# Altium PCB Module Board.PcbDoc (part 5 of 6)
Units mm, origin at the board's own origin, x right, y up, seen from the top; angles counter-clockwise.
Board outline 300 x 80 mm, 4 copper layers (Top Layer, GND1-Layer, GND2-Layer, Bottom Layer), stack 1.586 mm thick; 425 components, 248 nets, 1063 pads, 936 vias.
Unrouted connection lines stored in the file: 3.
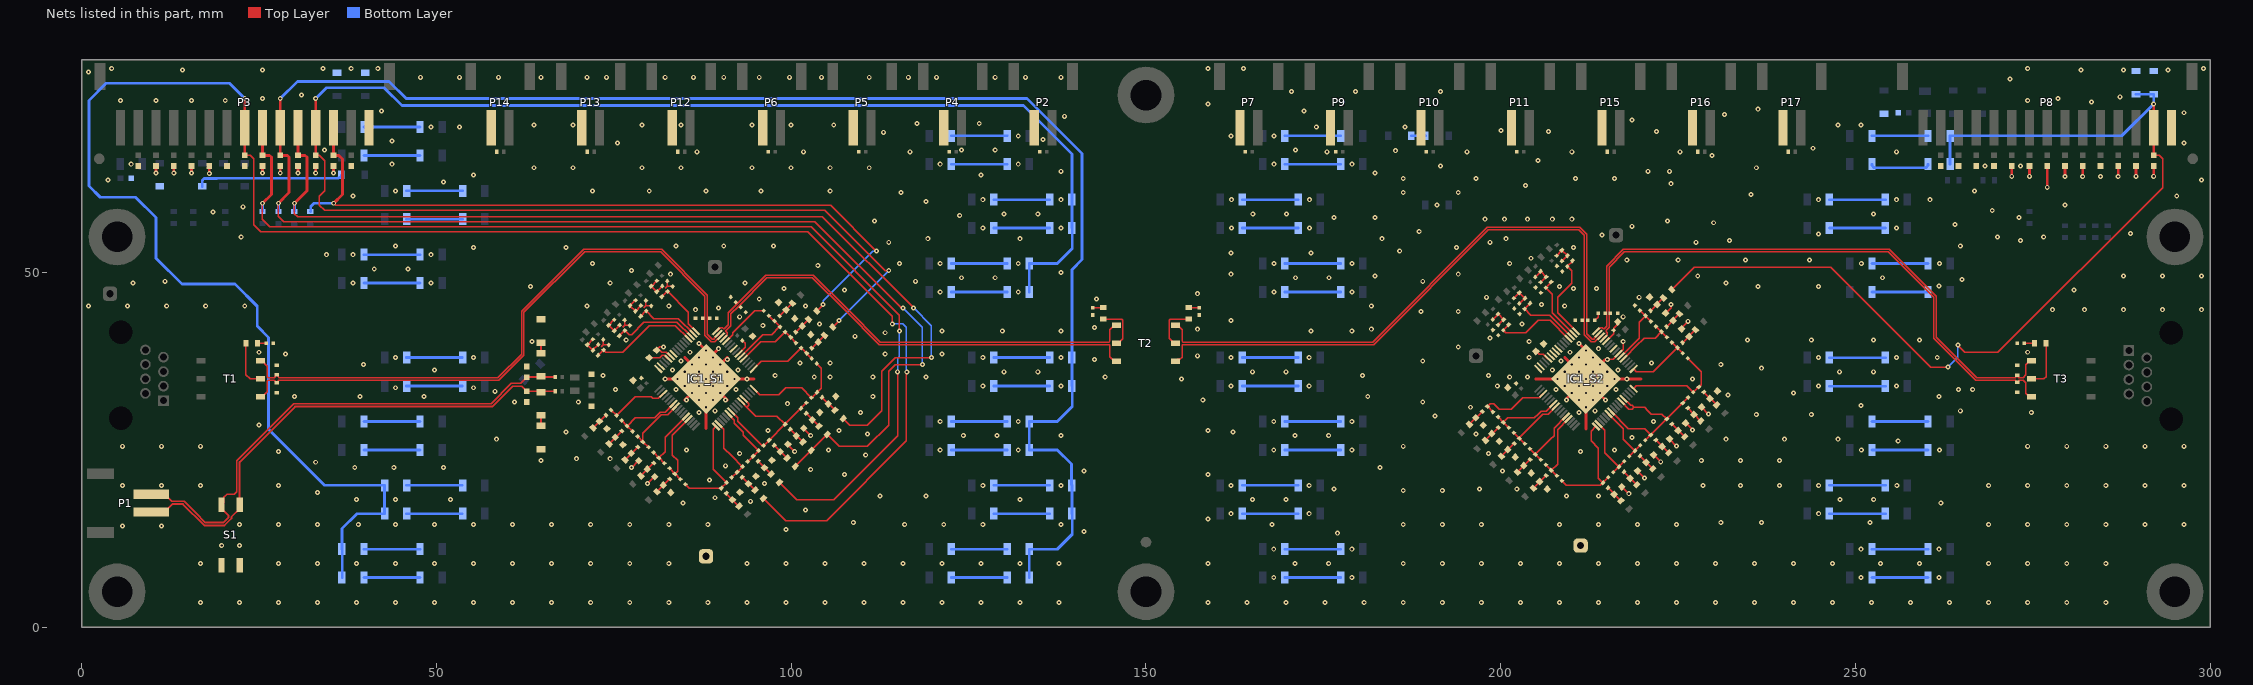
[diagram p6: the nets of this part, all layers, seen from the top]

## Via types
v1: diameter 0.7, hole 0.3, Top Layer to Bottom Layer, 936 vias

## Nets (pads, with @x,y where several pads share a name; then routed paths per layer and width w, separated by ;. In a path a pad name is that pad's centre, name@x,y a point inside that pad or via, vN(x,y) a via of type N, cw(c..) or ccw(c..) an arc to the next point about the centre after c; other vN are vias at no path point) (continued)
CELL_REF_S2: C62_S2.2 D6_S2.2 D7_S2.1 P8.2 R48_S2.2 R57_RB_C12.1 R59_RB_C12.1 | length 139.8
  Top Layer w0.2: R48_S2.2@224.085,47.585 227.25,50.75 246.5,50.75 260.6,36.65 v1(263,36.65) ; v1(264.4,39.75) 265.4,38.75 270.053,38.75 293.25,61.947 293.25,66 292.75,66.5 C62_S2.2@292,66.5
  Top Layer w0.4: C62_S2.2@292,66.5 P8.2@292,70.4 v1(292,73.75)
  Bottom Layer w0.2: v1(263,36.65) 264.4,38.05 v1(264.4,39.75)
  Bottom Layer w0.4: R59_RB_C12.1@263.302,65.25 R57_RB_C12.1@263.302,69.25 287.5,69.25 v1(292,73.75) D6_S2.2@292,75.115 D7_S2.1@289.5,75.115
CT_1_S1: C56_S1.1 C59_S1.2 IC1_S1.37 R47_S1.1 | length 9.6
  Top Layer w0.2: IC1_S1.37@93.295,37.82 95.725,40.25 96.325,40.25 97.768,40.25 C59_S1.2@99.134,41.616 99.905,40.845 C56_S1.1@100.677,40.073
CT_1_S2: C56_S2.1 C59_S2.2 IC1_S2.37 R47_S2.1 | length 9.1
  Top Layer w0.2: IC1_S2.37@217.295,37.82 219.4,39.925 219.825,40.35 220.137,40.663 220.225,40.75 221.75,40.75 R47_S2.1@222.625,41.625 ; C59_S2.2@221.854,42.396 R47_S2.1@222.625,41.625 ; R47_S2.1@222.646,41.646 R47_S2.1@222.625,41.625 ; C56_S2.1@223.397,40.854 R47_S2.1@222.625,41.625
CT_2_S1: C53_S1.1 C56_S1.2 IC1_S1.33 R44_S1.1 | length 10
  Top Layer w0.2: IC1_S1.33@94.709,36.406 95.803,37.5 99.518,37.5 C56_S1.2@101.384,39.366 C53_S1.1@102.897,37.854
CT_2_S2: C53_S2.1 C56_S2.2 IC1_S2.33 R44_S2.1 | length 9.9
  Top Layer w0.2: IC1_S2.33@218.709,36.406 219.115,36 221.5,36 224.854,39.354 224.854,39.396 C56_S2.2@224.104,40.146 ; R44_S2.1@224.896,39.396 224.896,39.354 C53_S2.1@225.647,38.604
CT_3_S1: C50_S1.1 C53_S1.2 IC1_S1.32 R42_S1.1 | length 15.2
  Top Layer w0.2: IC1_S1.32@94.709,33.594 95.553,32.75 98.25,32.75 99.25,33.75 99.475,33.75 101.457,33.75 C50_S1.1@102.854,32.353 102.896,32.353 R42_S1.1@103.646,33.104 104.25,33.707 104.25,36.5 C53_S1.2@103.604,37.146
CT_3_S2: C50_S2.1 C53_S2.2 IC1_S2.32 R42_S2.1 | length 15
  Top Layer w0.2: IC1_S2.32@218.709,33.594 219.115,34 224.225,34 226.207,34 C50_S2.1@227.104,33.103 227.854,33.854 R42_S2.1@227.896,33.854 228.25,34.207 228.25,36 C53_S2.2@226.354,37.896
CT_4_S1: C42_S1.1 C50_S1.2 IC1_S1.23 IC1_S1.27 IC1_S1.28 R34_S1.1 R37_S1.1 R39_S1.1 | length 24.5
  Top Layer w0.2: IC1_S1.23@91.527,30.412 92.439,29.5 92.439,29.056 94.485,27.01 95.891,25.603 C42_S1.1@96.104,25.603 96.875,26.375 99.125,28.625 101.375,30.875 C50_S1.2@102.146,31.646 ; IC1_S1.27@92.941,31.827 93.736,31.032 ; IC1_S1.28@93.295,32.18 94,31.475 94,31.297 93.736,31.032 ; R37_S1.1@99.146,28.604 98,29.75 97.225,29.75 95.018,29.75 93.736,31.032
CT_4_S2: C42_S2.1 C50_S2.2 IC1_S2.23 IC1_S2.27 IC1_S2.28 R34_S2.1 R37_S2.1 R39_S2.1 | length 25.1
  Top Layer w0.2: IC1_S2.23@215.527,30.412 217.939,28 218.225,28 220.25,28 R34_S2.1@221.125,27.125 ; IC1_S2.27@216.941,31.827 218.018,30.75 218.5,30.75 218.75,31 ; IC1_S2.28@217.295,32.18 217.348,32.18 218.278,31.25 218.5,31.25 218.75,31 ; C42_S2.1@220.354,26.353 R34_S2.1@221.125,27.125 ; C50_S2.2@226.396,32.396 225.625,31.625 R37_S2.1@223.375,29.375 ; 218.75,31 220.25,31 220.737,30.512 221.2,30.05 222.7,30.05 R37_S2.1@223.375,29.375 ; R34_S2.1@221.125,27.125 221.896,27.896 R37_S2.1@223.375,29.375
CT_7_S1: C38_S1.1 C42_S1.2 IC1_S1.22 R29_S1.1 | length 9.1
  Top Layer w0.2: IC1_S1.22@91.173,30.059 91.173,29.991 92,29.164 92,28.75 93.25,27.5 93.25,27.043 93.884,26.409 C42_S1.2@95.396,24.896 94.625,24.125 C38_S1.1@93.854,23.353
CT_7_S2: C38_S2.1 C42_S2.2 IC1_S2.22 R29_S2.1 | length 8.9
  Top Layer w0.2: IC1_S2.22@215.173,30.059 217.25,27.982 217.25,27.025 217.25,26.5 R29_S2.1@218.875,24.875 ; C38_S2.1@218.104,24.103 R29_S2.1@218.875,24.875 ; C42_S2.2@219.646,25.646 R29_S2.1@218.875,24.875
CT_8_S1: C32_S1.1 C38_S1.2 IC1_S1.18 R26_S1.1 | length 9.6
  Top Layer w0.2: IC1_S1.18@89.759,28.645 90.5,27.904 90.5,25.25 91.612,24.138 93.104,22.646 C38_S1.2@93.146,22.646 92.375,21.875 C32_S1.1@91.604,21.103
CT_8_S2: C32_S2.1 C38_S2.2 IC1_S2.18 R26_S2.1 | length 9.4
  Top Layer w0.2: IC1_S2.18@213.759,28.645 214.65,27.754 214.65,24.6 R26_S2.1@216.646,22.604 ; C32_S2.1@215.854,21.853 216.625,22.625 C38_S2.2@217.396,23.396
CT_9_S1: C28_S1.1 C32_S1.2 IC1_S1.17 R21_S1.1 | length 15.2
  Top Layer w0.2: C28_S1.1@85.103,20.146 85.646,19.604 R21_S1.1@90.146,19.604 90.146,19.646 C32_S1.2@90.896,20.396 89,22.293 89,23.375 89,27.885 IC1_S1.17@89.406,28.291
CT_9_S2: C28_S2.1 C32_S2.2 IC1_S2.17 R21_S2.1 | length 16.2
  Top Layer w0.2: C28_S2.1@208.603,20.646 209.25,20 214,20 214.375,20.375 C32_S2.2@215.146,21.146 ; IC1_S2.17@213.406,28.291 212.75,27.635 212.75,26.25 213.75,25.25 213.75,21 R21_S2.1@214.396,20.354
CT_10_S1: C22_S1.1 C28_S1.2 IC1_S1.13 R18_S1.1 | length 11.4
  Top Layer w0.2: C22_S1.1@82.853,22.396 83.604,21.646 R18_S1.1@83.604,21.604 ; C28_S1.2@84.396,20.854 83.646,21.604 R18_S1.1@83.604,21.604 ; IC1_S1.13@85.534,29.352 83.25,27.068 83.25,25.95 83.25,24.25 84,23.5 84,22 R18_S1.1@83.604,21.604
CT_10_S2: C22_S2.1 C28_S2.2 IC1_S2.13 R18_S2.1 | length 10.4
  Top Layer w0.2: C22_S2.1@206.353,22.896 207.125,22.125 C28_S2.2@207.896,21.354 ; R18_S2.1@207.104,22.104 208,23 208,25.425 208,27.818 IC1_S2.13@209.534,29.352
CT_11_S1: C15_S1.1 C22_S1.2 IC1_S1.12 R14_S1.1 | length 9.6
  Top Layer w0.2: C15_S1.1@80.603,24.646 81.354,23.896 R14_S1.1@81.354,23.854 ; C22_S1.2@82.146,23.104 81.396,23.854 R14_S1.1@81.354,23.854 ; IC1_S1.12@85.18,29.705 82.25,26.775 82.25,24.75 R14_S1.1@81.354,23.854
CT_11_S2: C15_S2.1 C22_S2.2 IC1_S2.12 R14_S2.1 | length 9.3
  Top Layer w0.2: C15_S2.1@204.103,25.146 204.854,24.396 R14_S2.1@204.854,24.354 ; C22_S2.2@205.646,23.604 205.625,23.604 204.875,24.354 204.875,24.375 206.962,26.463 207.5,27 207.5,28.025 IC1_S2.12@209.18,29.705
CT_12_S1: C10_S1.1 C15_S1.2 IC1_S1.8 R10_S1.1 | length 9.7
  Top Layer w0.2: C10_S1.1@78.353,26.896 79.104,26.146 R10_S1.1@79.104,26.104 ; C15_S1.2@79.896,25.354 79.146,26.104 R10_S1.1@79.104,26.104 ; IC1_S1.8@83.766,31.119 82.596,29.95 81.7,29.95 79.104,27.354 R10_S1.1@79.104,26.104
CT_12_S2: C10_S2.1 C15_S2.2 IC1_S2.8 R10_S2.1 | length 9.3
  Top Layer w0.2: C10_S2.1@201.853,27.396 R10_S2.1@202.625,26.625 ; C15_S2.2@203.396,25.854 R10_S2.1@202.625,26.625 ; IC1_S2.8@207.766,31.119 206.671,30.025 205.926,30.025 204.663,28.762 202.604,26.702 R10_S2.1@202.604,26.604 R10_S2.1@202.625,26.625
CT_13_S1: C4_S1.1 C10_S1.2 IC1_S1.7 R8_S1.1 | length 10
  Top Layer w0.2: C4_S1.1@76.103,29.146 76.854,28.396 R8_S1.1@76.854,28.354 ; C10_S1.2@77.646,27.604 76.896,28.354 78.043,29.5 79.7,29.5 80.75,29.5 81.55,30.3 82.239,30.3 IC1_S1.7@83.412,31.473
CT_13_S2: C4_S2.1 C10_S2.2 IC1_S2.7 R8_S2.1 | length 10.3
  Top Layer w0.2: C4_S2.1@199.603,29.646 R8_S2.1@200.375,28.875 ; R8_S2.1@200.354,28.854 R8_S2.1@200.375,28.875 ; C10_S2.2@201.146,28.104 R8_S2.1@200.375,28.875 ; IC1_S2.7@207.412,31.473 206.389,30.45 205.7,30.45 205.25,30 204.743,29.493 204.257,29.493 204.25,29.5 203.925,29.5 201,29.5 R8_S2.1@200.375,28.875
CT_14_S1: C4_S1.2 IC1_S1.3 R2_S1.1 | length 9.2
  Top Layer w0.2: R2_S1.1@74.604,30.604 74.646,30.604 C4_S1.2@75.396,29.854 78.043,32.5 80.25,32.5 80.5,32.25 81.302,32.25 81.939,32.887 IC1_S1.3@81.998,32.887
CT_14_S2: C4_S2.2 IC1_S2.3 R2_S2.1 | length 10.3
  Top Layer w0.2: C4_S2.2@198.896,30.354 198.125,31.125 198.5,31.5 199,31.5 199.75,30.75 201.485,30.75 203.085,32.35 205.39,32.35 205.777,32.737 205.848,32.737 IC1_S2.3@205.998,32.887
CT_REF_S1: C59_S1.1 C61_S1.2 IC1_S1.38 R49_S1.1 | length 9.4
  Top Layer w0.2: IC1_S1.38@92.941,38.173 96.018,41.25 97.25,41.25 98.323,42.323 C59_S1.1@98.427,42.323 C61_S1.2@96.854,43.896
CT_REF_S2: C59_S2.1 C61_S2.2 IC1_S2.38 R49_S2.1 | length 9.3
  Top Layer w0.2: IC1_S2.38@216.941,38.173 219.492,40.725 219.492,41.308 219.492,42.992 R49_S2.1@220.396,43.896 ; C61_S2.2@219.604,44.646 220.375,43.875 C59_S2.1@221.147,43.104
GND_S1: C1_S1.1 C2_S1.1 C5_S1.1 C6_S1.1 C7_S1.1 C8_S1.1 C9_S1.1 C11_S1.1 C12_S1.1 C13_S1.1 C14_S1.1 C16_S1.1 C17_S1.1 C19_S1.1 C20_S1.1 C21_S1.1 C23_S1.1 C24_S1.1 C25_S1.1 C26_S1.1 C27_S1.1 C30_S1.1 C31_S1.1 C33_S1.1 C34_S1.1 C35_S1.1 C36_S1.1 C37_S1.1 C39_S1.1 C40_S1.1 C43_S1.1 C44_S1.1 C45_S1.1 C46_S1.1 C47_S1.1 C48_S1.1 C49_S1.1 C51_S1.1 C52_S1.1 C54_S1.1 C55_S1.1 C57_S1.1 C58_S1.1 C60_S1.1 C61_S1.1 C62_S1.1 C63_S1.1 C64.1 C65.1 C67.1 C68.1 C69.1 C70.1 C71.1 C72.2 C73.1 C74.2 D4_S1.2 D6_S1.1 D7_S1.2 D10.1 D12.1 D13.1 D14.1 IC1_S1.39 IC1_S1.41 IC1_S1.44 IC1_S1.58 IC1_S1.59 IC1_S1.63 IC1_S1.64 IC1_S1.65 P2.2 P3.1 P4.2 P5.2 P6.2 P12.2 P13.2 P14.2 R61_S1.2 R62_S1.2 R63_S1.2 S1.1 S1.2 TP1_S1.1 | length 53.2
  Top Layer w0.2: 73.25,39.5 73.53,39.78 ; C45_S1.1@73.53,40.53 73.53,39.78 ; C46_S1.1@74.28,39.78 73.53,39.78 ; 76.25,42.25 76.53,42.53 ; C34_S1.1@76.53,43.28 76.53,42.53 ; C35_S1.1@77.28,42.53 76.53,42.53 ; v1(77.5,22.5) 78.47,23.47 C14_S1.1@78.53,23.47 ; 79.25,45 79.53,45.28 ; C24_S1.1@79.53,46.03 79.53,45.28 ; v1(79.75,20.25) 80.72,21.22 C20_S1.1@80.78,21.22 ; C25_S1.1@80.28,45.28 79.53,45.28 ; C21_S1.1@81.03,39.03 81.5,39.5 v1(82,39.5) ; C21_S1.1@81.156,39 81.186,39.03 81.455,39.03 81.735,38.75 82.414,38.75 82.991,38.173 IC1_S1.59@83.059,38.173 ; 82.25,47.75 82.53,48.03 ; C8_S1.1@82.53,48.78 82.53,48.03 ; C9_S1.1@83.28,48.03 82.53,48.03 ; IC1_S1.44@90.82,40.295 91.75,41.225 91.75,41.5 94.854,44.604 C61_S1.1@96.147,44.604 ; IC1_S1.39@92.588,38.527 93.5,39.439 93.5,40 C16_S1.1@93.103,40.396 ; C43_S1.1@99.53,25.78 99.53,25.72 v1(100.5,24.75) ; C47_S1.1@101.78,28.03 101.78,27.97 v1(102.75,27)
  Top Layer w0.4: v1(10.5,64) C5_S1.1@10.5,65 ; v1(13,64) C13_S1.1@13,65 ; v1(15.5,64) C19_S1.1@15.5,65 ; v1(18,63.95) C26_S1.1@18,65 ; v1(25.5,64) C39_S1.1@25.5,65 ; v1(28,64) C48_S1.1@28,65.05 ; v1(30.5,64) C51_S1.1@30.5,65.05 ; v1(33,64) C54_S1.1@33,65 ; v1(35.5,64) C57_S1.1@35.5,65.05 ; v1(82.25,35) v1(84,35) ; v1@85,32 v1(86,33) ; 85,38 v1(86,37) ; v1(87,40) v1(88,39) ; 88,28 v1(88,31) ; v1(88,37) 88,37.5 v1(89.75,39.25) ; v1(90,33) v1@91,32 ; v1(90,37) v1@91,38 ; v1(92,35) v1(93.75,35) 94.75,35
  other v1: 16.75,3.5 22.25,3.5 27.75,3.5 33.25,3.5 38.75,3.5 44.25,3.5 49.75,3.5 55.25,3.5 60.75,3.5 66.25,3.5 71.75,3.5 77.25,3.5 82.75,3.5 88.25,3.5 93.75,3.5 99.25,3.5 104.75,3.5 110.25,3.5 115.75,3.5 121.25,3.5 126.75,3.5 132.25,3.5 137.75,3.5 16.75,9 27.75,9 33.25,9 38.75,9 44.25,9 49.75,9 55.25,9 60.75,9 66.25,9 71.75,9 77.25,9 82.75,9 93.75,9 99.25,9 104.75,9 110.25,9 115.75,9 121.25,9 126.75,9 132.25,9 137.75,9 19.75,11.5 22.25,11.5 141.25,13.5 99.25,13.75 5.75,14.25 11.25,14.25 22.25,14.5 27.75,14.5 33.25,14.5 39,14.5 44.25,14.5 49.75,14.5 55.25,14.5 60.75,14.5 66.25,14.5 71.75,14.5 77.25,14.5 82.75,14.5 88.25,14.5 116,14.5 121.5,14.5 127,14.5 138,14.5 108.75,14.75 102,16.5 84.75,17.5 94.25,17.75 38.75,18 44.25,18 52,18 132.25,18 89.25,18.25 112.5,18.5 119,18.5 33.25,19 5.75,20 11.25,20 16.75,20 27.75,20 127,20 138,20 96.25,20.25 88.5,20.75 107.5,21.5 141.25,22 102.75,22.25 38.5,22.5 44,22.5 51,22.5 90.75,22.75 33,23.25 64.75,23.5 69.75,23.75 74.5,23.75 110.5,24.25 92.75,24.5 27.75,24.75 85.25,25 105.25,25 121,25 132,25 5.75,25.5 11.25,25.5 16.75,25.5 58.5,26.5 124.25,27 129,27 138,27 110.75,27.25 68.25,27.5 96.75,27.75 106.75,27.75 25,28.5 121,29 132,29 87,30.25 109.75,30.25 89.25,30.5 99.5,31.5 61,31.75 70,31.75 85.25,32 87,32 89,32 90.75,32 30,32.5 39.25,32.5 48.25,32.5 111.5,32.5 88,33 58.25,33.25 75.25,33.5 83.75,33.5 92.25,33.5 44.25,33.75 55.25,33.75 85,34 87,34 89,34 91,34 127,34 138,34 86,35 88,35 90,35 103.25,35.25 105.5,35.25 111.5,35.25 119,35.25 144.25,35.25 73.5,35.5 97.75,35.5 85,36 87,36 89,36 91,36 130,36 134.75,36 49.75,36.25 83.25,36.25 92.5,36.25 39.75,37 101.25,37.25 105.5,37.25 84.5,37.5 91,37.75 142.75,37.75 44.25,38 55.25,38 87,38 89,38 127,38 138,38 28.75,38.5 113.25,38.5 121.25,38.5 25,38.75 85.75,38.75 63.5,40.25 76.75,40.5 109,41 113.25,41.5 121.25,41.75 129.75,41.75 138,41.75 142.75,42.25 96,42.5 104,42.75 92.75,43.75 86.5,44.75 89.75,45 1,45.25 6.5,45.25 12,45.25 17.5,45.25 23,45.25 71.25,45.25 82.75,45.25 102,45.25 95.5,46.25 143,46.25 121,47.25 132,47.25 107.5,47.5 99,47.75 63.25,48 7.25,48.5 38.25,48.5 49.25,48.5 74.5,48.5 93.5,48.5 11.75,48.75 117.5,48.75 124,49.25 128.75,49.25 83,49.75 138,50 77.5,50.25 41.25,50.5 46,50.5 103.75,51 72,51.25 115.25,51.25 121,51.25 132,51.25 34.5,52.5 38.25,52.5 49.25,52.5 55.25,53.5 68.25,53.5 44.25,53.75 83.75,53.75 90.5,53.75 97.5,53.75 113.75,54.25 119.25,54.75 132.25,54.75 22.5,55 127,56.25 138,56.25 111.75,57.25 123.75,58 130,58.25 134.75,58.25 18.5,58.5 22.75,59.25 119,60 127,60.25 138,60.25 38.25,60.75 115.5,61.25 44.25,61.5 72,61.5 80,61.5 88,61.5 95.75,61.5 105.5,61.5 51,62.75 3.75,63 55.25,63.75 126.75,63.75 138,64.25 63.75,64.75 69.25,64.75 79,64.75 84.5,64.75 94.5,64.75 100,64.75 105.5,64.75 111,64.75 7,65.25 43.75,65.25 121,65.25 132,65.25 86.75,67 101.75,67 116.75,67 34.25,67.25 124,67.25 128.75,67.25 75.5,68.25 43.75,68.5 135.5,68.75 132,69.25 113,69.75 49.25,70.5 53.25,70.5 63.75,70.75 69.25,70.75 79,70.75 84.5,70.75 94.5,70.75 100,70.75 106,70.75 117.75,71 126.5,71 138.5,72 42.25,72.75 5.5,74.25 10.5,74.25 15.5,74.25 20.25,74.25 25.5,74.5 31,75 47.75,77.5 53.25,77.5 58.75,77.5 64.75,77.5 71.25,77.5 74,77.5 82.25,77.5 86.25,77.5 90.5,77.5 95.5,77.5 99.75,77.5 104.25,77.5 111,77.5 116.5,77.5 120.5,77.5 128.75,77.5 133,77.5 138,77.5 1,78.25 14.25,78.5 25.5,78.5 4.25,78.75 34,78.75 38,78.75 41.75,78.75
GND_S2: C1_S2.1 C2_S2.1 C5_S2.1 C6_S2.1 C7_S2.1 C8_S2.1 C9_S2.1 C11_S2.1 C12_S2.1 C13_S2.1 C14_S2.1 C16_S2.1 C17_S2.1 C19_S2.1 C20_S2.1 C21_S2.1 C23_S2.1 C24_S2.1 C25_S2.1 C26_S2.1 C27_S2.1 C30_S2.1 C31_S2.1 C33_S2.1 C34_S2.1 C35_S2.1 C36_S2.1 C37_S2.1 C39_S2.1 C40_S2.1 C43_S2.1 C44_S2.1 C45_S2.1 C46_S2.1 C47_S2.1 C48_S2.1 C49_S2.1 C51_S2.1 C52_S2.1 C54_S2.1 C55_S2.1 C57_S2.1 C58_S2.1 C60_S2.1 C61_S2.1 C62_S2.1 C63_S2.1 C75.1 C76.1 C77.1 C78.1 C79.1 C80.1 D4_S2.2 D6_S2.1 D7_S2.2 D15.1 D16.1 IC1_S2.39 IC1_S2.41 IC1_S2.44 IC1_S2.56 IC1_S2.57 IC1_S2.58 IC1_S2.59 IC1_S2.63 IC1_S2.64 IC1_S2.65 P7.2 P8.1 P9.2 P10.2 P11.2 P15.2 P16.2 P17.2 R61_S2.2 R62_S2.2 R63_S2.2 TP1_S2.1 | length 49.9
  Top Layer w0.2: C76.1@213.25,43.25 213.7,43.7 C79.1@213.7,44.25 ; IC1_S2.44@214.82,40.295 215.897,41.371 215.897,42.147 216.47,42.72 C17_S2.1@216.47,43.03 ; v1(215,37.75) 215.811,37.75 IC1_S2.39@216.588,38.527 216.738,38.677 217.25,39.189 v1(217.25,40.25) ; C31_S2.1@217.066,19.785 v1(218.035,18.816) ; C37_S2.1@219.28,22 v1(220.25,21.03) ; C40_S2.1@221.566,24.285 v1(222.535,23.316) ; C58_S2.1@223.25,44.28 224,45.03 v1(224,45.5) ; C43_S2.1@223.78,26.5 v1(224.75,25.53) ; C55_S2.1@225.5,42.03 225.5,42.235 v1(226.383,43.117) ; C47_S2.1@226.066,28.785 v1(227.035,27.816) ; C49_S2.1@228.28,31 v1(229.25,30.03)
  Top Layer w0.4: 204.929,35 v1(208,35) ; 209,38 v1(210,37) ; v1(209.25,32) 209.307,32.057 209.307,32.307 v1(210,33) ; v1(211,40) v1(212,39) ; 212,27.929 v1(212,31) ; v1(214,33) 214,32.75 v1(214.75,32) ; v1(214,37) 214.693,37.693 214.943,37.693 v1(215,37.75) ; v1(216,35) v1(217.75,35) 219.75,35 ; v1(272,63.55) C26_S2.1@272,65.05 ; v1(274.5,63.55) C30_S2.1@274.5,65.05 ; v1(277,62) C36_S2.1@277,65 ; v1(279.5,63.5) C39_S2.1@279.5,65 ; v1(282,63.5) C48_S2.1@282,65 ; v1(287,63.5) C54_S2.1@287,65 ; v1(289.5,63.55) C57_S2.1@289.5,65.05 ; v1(292,63.55) C62_S2.1@292,65.05
  other v1: 158.75,3.5 164.25,3.5 169.75,3.5 175.25,3.5 180.75,3.5 186.25,3.5 191.75,3.5 197.25,3.5 202.75,3.5 208.25,3.5 213.75,3.5 219.25,3.5 224.75,3.5 230.25,3.5 235.75,3.5 241.25,3.5 246.75,3.5 252.25,3.5 257.75,3.5 263.25,3.5 268.75,3.5 274.25,3.5 279.75,3.5 285.25,3.5 168,7 179,7 250.75,7 261.75,7 158.75,9 171,9 175.75,9 186.25,9 191.75,9 197.25,9 202.75,9 208.25,9 213.75,9 219.25,9 224.75,9 230.25,9 235.75,9 241.25,9 246.75,9 253.5,9 259,9 268.75,9 274.25,9 279.75,9 285.25,9 168,11 179,11 250.75,11 261.75,11 177,13.25 167.75,14.5 186.25,14.5 191.75,14.5 197.25,14.5 208.25,14.5 213.75,14.5 219.25,14.5 224.75,14.5 268.75,14.5 274.25,14.5 279.75,14.5 285.25,14.5 290.75,14.5 296.25,14.5 231,14.75 236.75,14.75 252,14.75 158.75,15.25 162,16 173,16 244.798,16 262,17.5 165,18 169.75,18 247.798,18 252.548,18 209.25,18.5 213.75,18.5 186.25,19.25 191.75,19.25 176.5,19.5 197,19.5 202.25,19.5 162,20 173,20 228.5,20 233.75,20 239.25,20 244.798,20 255.798,20 268.75,20 274.25,20 279.75,20 285.25,20 290.75,20 296.25,20 158.75,21.5 200.25,22 183,22.5 228.25,23.5 233.75,23.5 239.25,23.5 198.25,24.5 211.25,24.75 168,25 179,25 216,25 250.798,25 261.798,25 186.25,25.5 274.25,25.5 279.75,25.5 285.25,25.5 290.75,25.5 296.25,25.5 256,26.25 231.75,26.5 240,26.5 247.5,26.5 218.5,26.75 171,27 175.75,27 196.5,27.25 162.25,27.5 158.75,27.75 168,29 179,29 221.5,29 190.75,29.75 236,30 243.75,30 211,30.25 274.75,30.25 213.25,30.5 264.75,30.5 195.75,31 250.75,31.25 189,31.75 158,32 211,32 213,32 181.25,32.5 261.75,32.5 232,32.75 212,33 241.25,33 207.75,33.5 216.25,33.5 264.5,33.5 266.5,33.5 162,34 173,34 199.5,34 209,34 211,34 213,34 215,34 244.75,34 255.75,34 155,35 210,35 212,35 214,35 227,35 201.25,35.25 203.75,35.25 180.5,35.5 198.25,35.5 165,36 169.75,36 209,36 211,36 213,36 215,36 247.75,36 252.5,36 207.25,36.25 216.5,36.25 236.75,36.5 212,37 231,37 221.25,37.25 189,37.5 208.5,37.5 162,38 173,38 204,38 211,38 213,38 244.75,38 255.75,38 261.5,38 157.25,38.25 209.75,38.75 274.25,38.75 213.75,39.25 194,39.5 204,40.25 234.75,40.5 243.75,40.5 252.5,40.5 259,40.5 198.5,40.75 173.25,41.75 179,41.75 157.25,42 181.75,42 203,42.75 162,43.25 217.25,43.75 188.75,44.5 194,44.5 277.75,44.75 282.25,44.75 287.75,44.75 293.25,44.75 298.75,44.75 181.75,45.25 209,45.25 205.75,45.5 198,46.5 219.5,46.5 157.25,47 168.048,47.25 179.048,47.25 280.75,47.5 210.25,47.75 213.5,47.75 208.25,48 236.25,48 244.75,48 261.75,48.1 231.75,48.5 189,48.75 265,49 171.048,49.25 175.798,49.25 253.798,49.25 182.25,49.5 227.75,49.5 287.75,49.5 293.25,49.5 298.75,49.5 162,49.75 194,49.75 168.048,51.25 179.048,51.25 201.25,51.25 250.798,51.25 261.798,51.25 217.75,51.75 225,51.75 234.5,51.75 243.5,51.75 204.25,52 162,52.75 173.25,52.75 185.75,53 193.75,53.5 210.25,53.5 264.75,53.75 198.5,54.25 227.5,54.25 232.25,54.5 273.25,54.5 183.25,54.75 200.75,54.75 270,55 276.5,55 214.25,55.25 244.75,55.4 288.75,55.5 188.5,55.75 162.048,56.25 173.048,56.25 255.75,56.25 218.5,56.5 264,56.75 230,57 223.5,57.25 197.75,57.5 200.5,57.5 203.75,57.5 207.25,57.5 210,57.5 176.5,57.75 182.25,57.75 273,57.75 165.048,58.25 169.798,58.25 252.5,58.25 269.25,58.75 191,59.5 279.5,59.5 162.048,60.25 173.048,60.25 244.75,60.25 255.75,60.25 260.5,60.25 295.25,60.75 235.25,61 186.25,61.25 194,61.25 266.75,61.5 203.5,62.25 224,62.5 298.75,63 186.25,63.25 196.5,63.25 210.5,63.25 216,63.25 284.5,63.5 182.25,64 220.75,64.25 223.75,64.25 236,64.75 191.5,65 268.25,65 273.25,65 168.048,65.25 179.048,65.25 205.25,65.75 229.75,66.5 175.5,67 195.25,67 210,67 225.25,67 255.75,67 185.15,67.15 171.048,67.25 244,67.5 296.25,68.25 162,69.25 168.048,69.25 221.95,69.85 206.7,69.875 200,70 174,70.5 186.5,70.5 247.5,70.75 250.75,70.75 218.5,71.5 231.5,72.25 296.25,72.5 172.25,72.75 236.25,73 158.75,73.75 283.25,74 274.25,74.25 278.5,74.5 287.25,74.75 170.5,75.5 179.5,75.5 191.5,75.5 271.75,77.25 281.75,78.5 287.75,78.5 294,78.5 158.75,78.75 163.75,78.75 274.25,78.75 299,78.75
GPIO0_S1: C9_S1.2 IC1_S1.49 R6_S1.1 | length 8.4
  Top Layer w0.2: R6_S1.1@81.78,46.573 82.53,47.323 C9_S1.2@82.573,47.323 85.5,44.396 85.5,42.803 IC1_S1.49@86.594,41.709
GPIO0_S2: C9_S2.2 IC1_S2.49 R6_S2.1 | length 12.4
  Top Layer w0.2: R6_S2.1@210.104,51.646 210.104,51.604 C9_S2.2@209.354,50.854 210,50.207 210,48.5 208,46.5 208,45.475 208,44.303 IC1_S2.49@210.594,41.709
GPIO1_S1: C25_S1.2 IC1_S1.50 R16_S1.1 | length 9.1
  Top Layer w0.2: R16_S1.1@78.78,43.823 79.53,44.573 C25_S1.2@79.573,44.573 80.646,43.5 83.275,43.5 84.096,43.5 IC1_S1.50@86.241,41.355
GPIO1_S2: C25_S2.2 IC1_S2.50 R16_S2.1 | length 9.2
  Top Layer w0.2: R16_S2.1@207.104,48.646 207.104,48.604 C25_S2.2@206.354,47.854 207.25,46.957 207.25,44.725 207.25,44.346 IC1_S2.50@210.241,41.355
GPIO2_S1: C35_S1.2 IC1_S1.51 R24_S1.1 | length 12.2
  Top Layer w0.2: R24_S1.1@75.78,41.073 76.53,41.823 C35_S1.2@76.573,41.823 77.146,41.25 77.5,41.25 79.25,43 82.775,43 83.889,43 IC1_S1.51@85.887,41.002
GPIO2_S2: C35_S2.2 IC1_S2.51 R24_S2.1 | length 9.2
  Top Layer w0.2: R24_S2.1@204.104,45.646 204.104,45.604 C35_S2.2@203.354,44.854 204.207,44 206.525,44 206.889,44 IC1_S2.51@209.887,41.002
GPIO3_S1: C46_S1.2 IC1_S1.52 R32_S1.1 | length 15.5
  Top Layer w0.2: R32_S1.1@72.78,38.323 72.823,38.323 C46_S1.2@73.573,39.073 73.896,38.75 76.25,38.75 80,42.5 82.275,42.5 83.682,42.5 IC1_S1.52@85.534,40.648
GPIO3_S2: C46_S2.2 IC1_S2.52 R32_S2.1 | length 12.2
  Top Layer w0.2: R32_S2.1@201.104,42.646 201.104,42.604 C46_S2.2@200.354,41.854 200.707,41.5 203.5,41.5 205.25,43.25 205.775,43.25 206.932,43.25 IC1_S2.52@209.534,40.648
ISENSE_N: C67.2 D11.1 P1.2 R52.1 S1.3 | length 71.1
  Top Layer w0.254: P1.2@9.85,16.25 11.7,16.25 12.8,17.35 14.291,17.35 17.295,14.346 20.14,14.346 21.127,15.333 21.127,15.557 22.27,16.7 S1.3@22.27,17.25 22.27,23.27 30.096,31.096 57.873,31.096 60.75,33.973 62.027,33.973 C67.2@62.75,33.25 64.635,33.25 D11.1@64.75,33.135 64.865,33.25 R52.1@66.75,33.25
ISENSE_P: C64.2 D9.1 P1.1 R51.1 S1.4 | length 72.5
  Top Layer w0.254: P1.1@9.85,18.75 11.7,18.75 12.696,17.754 14.458,17.754 16.106,16.106 17.462,14.75 19.973,14.75 20.721,15.498 20.721,15.709 19.73,16.7 S1.4@19.73,17.25 20.053,17.573 20.053,18.303 20.5,18.75 21.5,18.75 21.866,19.116 21.866,23.437 29.929,31.5 57.706,31.5 60.583,34.377 61.877,34.377 C64.2@62.75,35.25 64.635,35.25 D9.1@64.75,35.365 64.865,35.25 R51.1@66.75,35.25
NetC2_S1_2: C2_S1.2 R1_S1.1 R2_S1.2 | length 2.6
  Top Layer w0.2: R1_S1.1@72.085,28.085 R2_S1.2@73.896,29.896
NetC2_S2_2: C2_S2.2 R1_S2.1 R2_S2.2 | length 2.6
  Top Layer w0.2: R1_S2.1@195.585,28.585 R2_S2.2@197.396,30.396
NetC3_S1_1: C3_S1.1 C8_S1.2 R5_S1.1 R6_S1.2 | length 3.3
  Top Layer w0.2: C3_S1.1@81.073,48.823 80.323,48.073 R5_S1.1@80.28,48.073 R6_S1.2@81.073,47.28 81.823,48.03 C8_S1.2@81.823,48.073
NetC3_S2_1: C3_S2.1 C8_S2.2 R5_S2.1 R6_S2.2 | length 3.3
  Top Layer w0.2: C3_S2.1@207.854,52.353 208.604,53.103 R5_S2.1@208.604,53.146 R6_S2.2@209.396,52.354 209.353,52.354 C8_S2.2@208.604,51.604
NetC6_S1_2: C6_S1.2 R7_S1.1 R8_S1.2 | length 2.6
  Top Layer w0.2: R7_S1.1@74.335,25.835 R8_S1.2@76.146,27.646
NetC6_S2_2: C6_S2.2 R7_S2.1 R8_S2.2 | length 2.6
  Top Layer w0.2: R7_S2.1@197.835,26.335 R8_S2.2@199.646,28.146
NetC14_S1_2: C14_S1.2 R9_S1.1 R10_S1.2 | length 2.6
  Top Layer w0.2: R9_S1.1@76.585,23.585 R10_S1.2@78.396,25.396
NetC14_S2_2: C14_S2.2 R9_S2.1 R10_S2.2 | length 2.6
  Top Layer w0.2: R9_S2.1@200.085,24.085 R10_S2.2@201.896,25.896
NetC18_S1_1: C18_S1.1 C24_S1.2 R15_S1.1 R16_S1.2 | length 3.3
  Top Layer w0.2: C18_S1.1@78.073,46.073 78.03,46.073 R15_S1.1@77.28,45.323 R16_S1.2@78.073,44.53 78.823,45.28 C24_S1.2@78.823,45.323
NetC18_S2_1: C18_S2.1 C24_S2.2 R15_S2.1 R16_S2.2 | length 3.3
  Top Layer w0.2: C18_S2.1@204.854,49.353 205.604,50.103 R15_S2.1@205.604,50.146 R16_S2.2@206.396,49.354 206.353,49.354 C24_S2.2@205.604,48.604
NetC20_S1_2: C20_S1.2 R13_S1.1 R14_S1.2 | length 2.6
  Top Layer w0.2: R13_S1.1@78.835,21.335 R14_S1.2@80.646,23.146
NetC20_S2_2: C20_S2.2 R13_S2.1 R14_S2.2 | length 2.6
  Top Layer w0.2: R13_S2.1@202.335,21.835 R14_S2.2@204.146,23.646
NetC21_S1_2: C21_S1.2 IC1_S1.60 | length 3
  Top Layer w0.2: C21_S1.2@80.053,38 80.364,38 80.394,37.97 80.424,38 81.489,38 81.833,38.344 82.11,38.344 82.634,37.82 IC1_S1.60@82.705,37.82
NetC21_S2_2: C21_S2.2 IC1_S2.60 | length 2.4
  Top Layer w0.2: C21_S2.2@204.788,38.962 204.948,38.962 205.41,38.5 205.954,38.5 206.634,37.82 IC1_S2.60@206.705,37.82
NetC27_S1_2: C27_S1.2 R17_S1.1 R18_S1.2 | length 2.6
  Top Layer w0.2: R17_S1.1@81.085,19.085 R18_S1.2@82.896,20.896
NetC27_S2_2: C27_S2.2 R17_S2.1 R18_S2.2 | length 2.6
  Top Layer w0.2: R17_S2.1@204.585,19.585 R18_S2.2@206.396,21.396
NetC29_S1_1: C29_S1.1 C34_S1.2 R23_S1.1 R24_S1.2 | length 3.3
  Top Layer w0.2: C29_S1.1@75.073,43.323 75.03,43.323 R23_S1.1@74.28,42.573 R24_S1.2@75.073,41.78 75.823,42.53 C34_S1.2@75.823,42.573
NetC29_S2_1: C29_S2.1 C34_S2.2 R23_S2.1 R24_S2.2 | length 3.3
  Top Layer w0.2: C29_S2.1@201.854,46.353 202.604,47.103 R23_S2.1@202.604,47.146 R24_S2.2@203.396,46.354 203.353,46.354 C34_S2.2@202.604,45.604
NetC31_S1_2: C31_S1.2 R20_S1.1 R21_S1.2 | length 2.6
  Top Layer w0.2: R21_S1.2@90.854,18.896 90.854,18.836 92.605,17.085 R20_S1.1@92.665,17.085
NetC31_S2_2: C31_S2.2 R20_S2.1 R21_S2.2 | length 2.6
  Top Layer w0.2: R21_S2.2@215.104,19.646 R20_S2.1@216.915,17.835
NetC37_S1_2: C37_S1.2 R25_S1.1 R26_S1.2 | length 2.6
  Top Layer w0.2: R26_S1.2@93.139,21.182 93.139,21.121 94.89,19.37 R25_S1.1@94.951,19.37
NetC37_S2_2: C37_S2.2 R25_S2.1 R26_S2.2 | length 2.6
  Top Layer w0.2: R26_S2.2@217.354,21.896 R25_S2.1@219.165,20.085
NetC40_S1_2: C40_S1.2 R28_S1.1 R29_S1.2 | length 2.6
  Top Layer w0.2: R29_S1.2@95.389,23.432 95.389,23.371 97.14,21.62 R28_S1.1@97.201,21.62
NetC40_S2_2: C40_S2.2 R28_S2.1 R29_S2.2 | length 2.6
  Top Layer w0.2: R29_S2.2@219.604,24.146 R28_S2.1@221.415,22.335
NetC41_S1_1: C41_S1.1 C45_S1.2 R31_S1.1 R32_S1.2 | length 3.3
  Top Layer w0.2: C41_S1.1@72.073,40.573 71.323,39.823 R31_S1.1@71.28,39.823 R32_S1.2@72.073,39.03 72.073,39.073 C45_S1.2@72.823,39.823
NetC41_S2_1: C41_S2.1 C45_S2.2 R31_S2.1 R32_S2.2 | length 3.3
  Top Layer w0.2: C41_S2.1@198.854,43.353 199.604,44.103 R31_S2.1@199.604,44.146 R32_S2.2@200.396,43.354 200.353,43.354 C45_S2.2@199.604,42.604
NetC43_S1_2: C43_S1.2 R33_S1.1 R34_S1.2 | length 2.6
  Top Layer w0.2: R34_S1.2@97.639,25.682 97.639,25.621 99.39,23.87 R33_S1.1@99.451,23.87
NetC43_S2_2: C43_S2.2 R33_S2.1 R34_S2.2 | length 2.6
  Top Layer w0.2: R34_S2.2@221.854,26.396 R33_S2.1@223.665,24.585
NetC47_S1_2: C47_S1.2 R36_S1.1 R37_S1.2 | length 2.6
  Top Layer w0.2: R37_S1.2@99.889,27.932 99.889,27.871 101.64,26.12 R36_S1.1@101.701,26.12
NetC47_S2_2: C47_S2.2 R36_S2.1 R37_S2.2 | length 2.6
  Top Layer w0.2: R37_S2.2@224.104,28.646 R36_S2.1@225.915,26.835
NetC49_S1_2: C49_S1.2 R38_S1.1 R39_S1.2 | length 2.6
  Top Layer w0.2: R39_S1.2@102.139,30.182 102.139,30.121 103.89,28.37 R38_S1.1@103.951,28.37
NetC49_S2_2: C49_S2.2 R38_S2.1 R39_S2.2 | length 2.5
  Top Layer w0.2: R39_S2.2@226.354,30.896 227.22,30.03 C49_S2.2@227.22,29.97 ; C49_S2.2@227.25,30 R38_S2.1@228.13,29.12
NetC52_S1_2: C52_S1.2 R41_S1.1 R42_S1.2 | length 2.6
  Top Layer w0.2: R42_S1.2@104.389,32.432 104.389,32.371 106.14,30.62 R41_S1.1@106.201,30.62
NetC52_S2_2: C52_S2.2 R41_S2.1 R42_S2.2 | length 2.6
  Top Layer w0.2: R42_S2.2@228.604,33.146 R41_S2.1@230.415,31.335
NetC55_S1_2: C55_S1.2 R43_S1.1 R44_S1.2 | length 2.6
  Top Layer w0.2: R44_S1.2@102.884,39.323 R43_S1.1@104.696,41.135
NetC55_S2_2: C55_S2.2 R43_S2.1 R44_S2.2 | length 2.6
  Top Layer w0.2: R44_S2.2@225.604,40.104 R43_S2.1@227.415,41.915
NetC58_S1_2: C58_S1.2 R46_S1.1 R47_S1.2 | length 2.6
  Top Layer w0.2: R47_S1.2@100.634,41.573 R46_S1.1@102.446,43.385
NetC58_S2_2: C58_S2.2 R46_S2.1 R47_S2.2 | length 2.6
  Top Layer w0.2: R47_S2.2@223.354,42.354 R46_S2.1@225.165,44.165
NetC63_S1_2: C63_S1.2 R48_S1.1 R49_S1.2 | length 2.6
  Top Layer w0.2: R49_S1.2@98.354,43.854 R48_S1.1@100.165,45.665
NetC63_S2_2: C63_S2.2 R48_S2.1 R49_S2.2 | length 2.6
  Top Layer w0.2: R49_S2.2@221.104,44.604 R48_S2.1@222.915,46.415
NetC71_2: C71.2 R53.1 | length 1.2
  Top Layer w0.2: R53.1@24.85,40 C71.2@26.023,40
NetC72_1: C72.1 R54.2 | length 1.5
  Top Layer w0.2: C72.1@142.5,45 143.923,45 R54.2@144,45.077
NetC77_2: C77.2 R55.1 | length 1.5
  Top Layer w0.2: R55.1@156,45.077 156.077,45 C77.2@157.5,45
NetC80_2: C80.2 R56.1 | length 1.4
  Top Layer w0.2: C80.2@273.75,40 R56.1@275.173,40
NetD2_S1_2: D2_S1.2 D8_S1.1 | length 20.9
  Bottom Layer w0.4: D2_S1.2@17,62.115 17,62.97 17.28,63.25 19.08,63.25 19.1,63.27 36.135,63.27 36.205,63.34 36.36,63.34 36.615,63.595 D8_S1.1@36.615,63.75
NetD2_S2_2: D2_S2.2 D8_S2.1 | length 2
  Bottom Layer w0.4: D8_S2.1@187.385,69.25 D2_S2.2@189.365,69.25
NetD9_2: D9.2 D10.2 | length 1.5
  Top Layer w0.254: D9.2@64.75,38.635 D10.2@64.75,40.115
NetD11_2: D11.2 D12.2 | length 1.5
  Top Layer w0.254: D12.2@64.75,28.385 D11.2@64.75,29.865
NetR53_2: R53.2 T1.5 | length 6.7
  Top Layer w0.2: R53.2@23.173,40 23.173,35.577 23.75,35 T1.5@25.19,35
NetR54_1: R54.1 T2.2 | length 6.6
  Top Layer w0.2: R54.1@144,43.423 146.577,43.423 146.75,43.25 146.75,40.685 146.065,40 T2.2@145.81,40
NetR55_2: R55.2 T2.5 | length 6.6
  Top Layer w0.2: T2.5@154.19,40 154,40 153.25,40.75 153.25,43.25 153.423,43.423 R55.2@156,43.423
NetR56_2: R56.2 T3.5 | length 6.8
  Top Layer w0.2: T3.5@274.81,35 276.5,35 276.827,35.327 R56.2@276.827,40
NetR57_RB_C11_2: R57_RB_C11.2 R58_RB_C11.1 | length 7.9
  Bottom Layer w0.4: R58_RB_C11.1@122.552,69.25 R57_RB_C11.2@130.448,69.25
NetR57_RB_C12_2: R57_RB_C12.2 R58_RB_C12.1 | length 7.9
  Bottom Layer w0.4: R58_RB_C12.1@252.302,69.25 R57_RB_C12.2@260.198,69.25
NetR57_RB_C21_2: R57_RB_C21.2 R58_RB_C21.1 | length 7.9
  Bottom Layer w0.4: R58_RB_C21.1@128.552,60.25 R57_RB_C21.2@136.448,60.25
NetR57_RB_C22_2: R57_RB_C22.2 R58_RB_C22.1 | length 7.9
  Bottom Layer w0.4: R58_RB_C22.1@246.302,60.25 R57_RB_C22.2@254.198,60.25
NetR57_RB_C31_2: R57_RB_C31.2 R58_RB_C31.1 | length 7.9
  Bottom Layer w0.4: R58_RB_C31.1@122.552,51.25 R57_RB_C31.2@130.448,51.25
NetR57_RB_C32_2: R57_RB_C32.2 R58_RB_C32.1 | length 7.9
  Bottom Layer w0.4: R58_RB_C32.1@252.302,47.25 R57_RB_C32.2@260.198,47.25
NetR57_RB_C41_2: R57_RB_C41.2 R58_RB_C41.1 | length 7.9
  Bottom Layer w0.4: R58_RB_C41.1@128.552,34 R57_RB_C41.2@136.448,34
NetR57_RB_C42_2: R57_RB_C42.2 R58_RB_C42.1 | length 7.9
  Bottom Layer w0.4: R58_RB_C42.1@246.315,37.97 R57_RB_C42.2@254.211,37.97
NetR57_RB_C51_2: R57_RB_C51.2 R58_RB_C51.1 | length 7.9
  Bottom Layer w0.4: R58_RB_C51.1@122.552,11 R57_RB_C51.2@130.448,11
NetR57_RB_C52_2: R57_RB_C52.2 R58_RB_C52.1 | length 7.9
  Bottom Layer w0.4: R58_RB_C52.1@252.302,7 R57_RB_C52.2@260.198,7
NetR57_RB_C61_2: R57_RB_C61.2 R58_RB_C61.1 | length 7.9
  Bottom Layer w0.4: R57_RB_C61.2@39.802,7 R58_RB_C61.1@47.698,7
NetR57_RB_C62_2: R57_RB_C62.2 R58_RB_C62.1 | length 7.9
  Bottom Layer w0.4: R57_RB_C62.2@169.552,11 R58_RB_C62.1@177.448,11
NetR57_RB_C71_2: R57_RB_C71.2 R58_RB_C71.1 | length 7.9
  Bottom Layer w0.4: R57_RB_C71.2@45.754,16 R58_RB_C71.1@53.65,16
NetR57_RB_C72_2: R57_RB_C72.2 R58_RB_C72.1 | length 7.9
  Bottom Layer w0.4: R57_RB_C72.2@163.552,20 R58_RB_C72.1@171.448,20
NetR57_RB_C81_2: R57_RB_C81.2 R58_RB_C81.1 | length 7.9
  Bottom Layer w0.4: R57_RB_C81.2@39.802,25 R58_RB_C81.1@47.698,25
NetR57_RB_C82_2: R57_RB_C82.2 R58_RB_C82.1 | length 7.9
  Bottom Layer w0.4: R57_RB_C82.2@169.552,29 R58_RB_C82.1@177.448,29
NetR57_RB_C91_2: R57_RB_C91.2 R58_RB_C91.1 | length 7.9
  Bottom Layer w0.4: R57_RB_C91.2@45.754,34 R58_RB_C91.1@53.65,34
NetR57_RB_C92_2: R57_RB_C92.2 R58_RB_C92.1 | length 7.9
  Bottom Layer w0.4: R57_RB_C92.2@163.552,38 R58_RB_C92.1@171.448,38
NetR57_RB_C101_2: R57_RB_C101.2 R58_RB_C101.1 | length 7.9
  Bottom Layer w0.4: R57_RB_C101.2@39.802,48.5 R58_RB_C101.1@47.698,48.5
NetR57_RB_C102_2: R57_RB_C102.2 R58_RB_C102.1 | length 7.9
  Bottom Layer w0.4: R57_RB_C102.2@169.552,51.25 R58_RB_C102.1@177.448,51.25
NetR57_RB_C121_2: R57_RB_C121.2 R58_RB_C121.1 | length 7.9
  Bottom Layer w0.4: R57_RB_C121.2@39.802,70.5 R58_RB_C121.1@47.698,70.5
NetR57_RB_C122_2: R57_RB_C122.2 R58_RB_C122.1 | length 7.9
  Bottom Layer w0.4: R57_RB_C122.2@169.552,69.25 R58_RB_C122.1@177.448,69.25
NetR57_RB_C1111_2: R57_RB_C1111.2 R58_RB_C1111.1 | length 7.9
  Bottom Layer w0.4: R57_RB_C1111.2@45.802,61.5 R58_RB_C1111.1@53.698,61.5
NetR57_RB_C1112_2: R57_RB_C1112.2 R58_RB_C1112.1 | length 7.9
  Bottom Layer w0.4: R57_RB_C1112.2@163.552,56.25 R58_RB_C1112.1@171.448,56.25
NetR57_RB_NA11_2: R57_RB_NA11.2 R58_RB_NA11.1 | length 7.9
  Bottom Layer w0.4: R58_RB_NA11.1@122.552,29 R57_RB_NA11.2@130.448,29
NetR57_RB_NA12_2: R57_RB_NA12.2 R58_RB_NA12.1 | length 7.9
  Bottom Layer w0.4: R58_RB_NA12.1@252.302,29 R57_RB_NA12.2@260.198,29
NetR57_RB_NA21_2: R57_RB_NA21.2 R58_RB_NA21.1 | length 7.9
  Bottom Layer w0.4: R58_RB_NA21.1@128.552,16 R57_RB_NA21.2@136.448,16
NetR57_RB_NA22_2: R57_RB_NA22.2 R58_RB_NA22.1 | length 7.9
  Bottom Layer w0.4: R58_RB_NA22.1@246.302,16 R57_RB_NA22.2@254.198,16
NetR59_RB_C11_2: R59_RB_C11.2 R60_RB_C11.1 | length 7.9
  Bottom Layer w0.4: R60_RB_C11.1@122.552,65.25 R59_RB_C11.2@130.448,65.25
NetR59_RB_C12_2: R59_RB_C12.2 R60_RB_C12.1 | length 8.5
  Bottom Layer w0.4: R60_RB_C12.1@252.302,65.25 252.302,65.075 252.627,64.75 259.873,64.75 260.198,65.075 R59_RB_C12.2@260.198,65.25
NetR59_RB_C21_2: R59_RB_C21.2 R60_RB_C21.1 | length 7.9
  Bottom Layer w0.4: R60_RB_C21.1@128.552,56.25 R59_RB_C21.2@136.448,56.25
NetR59_RB_C22_2: R59_RB_C22.2 R60_RB_C22.1 | length 7.9
  Bottom Layer w0.4: R60_RB_C22.1@246.302,56.25 R59_RB_C22.2@254.198,56.25
NetR59_RB_C31_2: R59_RB_C31.2 R60_RB_C31.1 | length 7.9
  Bottom Layer w0.4: R60_RB_C31.1@122.552,47.25 R59_RB_C31.2@130.448,47.25
NetR59_RB_C32_2: R59_RB_C32.2 R60_RB_C32.1 | length 7.9
  Bottom Layer w0.4: R60_RB_C32.1@252.302,51.25 R59_RB_C32.2@260.198,51.25
NetR59_RB_C41_2: R59_RB_C41.2 R60_RB_C41.1 | length 7.9
  Bottom Layer w0.4: R60_RB_C41.1@128.552,38 R59_RB_C41.2@136.448,38
NetR59_RB_C42_2: R59_RB_C42.2 R60_RB_C42.1 | length 7.9
  Bottom Layer w0.4: R60_RB_C42.1@246.315,33.97 R59_RB_C42.2@254.211,33.97
NetR59_RB_C51_2: R59_RB_C51.2 R60_RB_C51.1 | length 7.9
  Bottom Layer w0.4: R60_RB_C51.1@122.552,7 R59_RB_C51.2@130.448,7
NetR59_RB_C52_2: R59_RB_C52.2 R60_RB_C52.1 | length 7.9
  Bottom Layer w0.4: R60_RB_C52.1@252.302,11 R59_RB_C52.2@260.198,11
NetR59_RB_C61_2: R59_RB_C61.2 R60_RB_C61.1 | length 7.9
  Bottom Layer w0.4: R59_RB_C61.2@39.802,11 R60_RB_C61.1@47.698,11
NetR59_RB_C62_2: R59_RB_C62.2 R60_RB_C62.1 | length 7.9
  Bottom Layer w0.4: R59_RB_C62.2@169.552,7 R60_RB_C62.1@177.448,7
NetR59_RB_C71_2: R59_RB_C71.2 R60_RB_C71.1 | length 7.9
  Bottom Layer w0.4: R59_RB_C71.2@45.754,20 R60_RB_C71.1@53.65,20
NetR59_RB_C72_2: R59_RB_C72.2 R60_RB_C72.1 | length 7.9
  Bottom Layer w0.4: R59_RB_C72.2@163.552,16 R60_RB_C72.1@171.448,16
NetR59_RB_C81_2: R59_RB_C81.2 R60_RB_C81.1 | length 7.9
  Bottom Layer w0.4: R59_RB_C81.2@39.802,29 R60_RB_C81.1@47.698,29
NetR59_RB_C82_2: R59_RB_C82.2 R60_RB_C82.1 | length 7.9
  Bottom Layer w0.4: R59_RB_C82.2@169.552,25 R60_RB_C82.1@177.448,25
NetR59_RB_C91_2: R59_RB_C91.2 R60_RB_C91.1 | length 7.9
  Bottom Layer w0.4: R59_RB_C91.2@45.754,38 R60_RB_C91.1@53.65,38
NetR59_RB_C92_2: R59_RB_C92.2 R60_RB_C92.1 | length 7.9
  Bottom Layer w0.4: R59_RB_C92.2@163.552,34 R60_RB_C92.1@171.448,34
NetR59_RB_C101_2: R59_RB_C101.2 R60_RB_C101.1 | length 7.9
  Bottom Layer w0.4: R59_RB_C101.2@39.802,52.5 R60_RB_C101.1@47.698,52.5
NetR59_RB_C102_2: R59_RB_C102.2 R60_RB_C102.1 | length 7.9
  Bottom Layer w0.4: R59_RB_C102.2@169.552,47.25 R60_RB_C102.1@177.448,47.25
NetR59_RB_C121_2: R59_RB_C121.2 R60_RB_C121.1 | length 7.9
  Bottom Layer w0.4: R59_RB_C121.2@39.802,66.5 R60_RB_C121.1@47.698,66.5
NetR59_RB_C122_2: R59_RB_C122.2 R60_RB_C122.1 | length 7.9
  Bottom Layer w0.4: R59_RB_C122.2@169.552,65.25 R60_RB_C122.1@177.448,65.25
NetR59_RB_C1111_2: R59_RB_C1111.2 R60_RB_C1111.1 | length 7.9
  Bottom Layer w0.4: R59_RB_C1111.2@45.802,57.5 R60_RB_C1111.1@53.698,57.5
NetR59_RB_C1112_2: R59_RB_C1112.2 R60_RB_C1112.1 | length 7.9
  Bottom Layer w0.4: R59_RB_C1112.2@163.552,60.25 R60_RB_C1112.1@171.448,60.25
NetR59_RB_NA11_2: R59_RB_NA11.2 R60_RB_NA11.1 | length 7.9
  Bottom Layer w0.4: R60_RB_NA11.1@122.552,25 R59_RB_NA11.2@130.448,25
NetR59_RB_NA12_2: R59_RB_NA12.2 R60_RB_NA12.1 | length 7.9
  Bottom Layer w0.4: R60_RB_NA12.1@252.302,25 R59_RB_NA12.2@260.198,25
NetR59_RB_NA21_2: R59_RB_NA21.2 R60_RB_NA21.1 | length 7.9
  Bottom Layer w0.4: R60_RB_NA21.1@128.552,20 R59_RB_NA21.2@136.448,20
NetR59_RB_NA22_2: R59_RB_NA22.2 R60_RB_NA22.1 | length 7.9
  Bottom Layer w0.4: R60_RB_NA22.1@246.302,20 R59_RB_NA22.2@254.198,20
RDTX_IN_S1_N: C70.2 D14.2 IC1_S1.46 T1.4 | length 87.3
  Top Layer w0.2: T1.4@25.19,32.46 25.445,32.46 26.2,33.215 26.2,34.708 26.317,34.825 27.183,34.825 27.3,34.708 27.3,34.6 27.45,34.45 D14.2@27.5,34.45 ; D14.2@27.55,34.45 27.7,34.6 27.7,34.708 27.817,34.825 58.825,34.825 62.35,38.35 62.35,44.355 70.895,52.9 81.6,52.9 87.85,46.65 87.85,43.528 ; C70.2@87.517,43.528 87.85,43.528 ; IC1_S1.46@90.113,41.002 90.042,41.002 89.468,40.428 89.433,40.428 89.213,40.208 88.757,40.208 87.85,41.116 87.85,43.528
RDTX_IN_S1_P: C69.2 D13.2 IC1_S1.47 T1.6 | length 87
  Top Layer w0.2: T1.6@25.19,37.54 25.445,37.54 26.2,36.785 26.2,35.292 26.317,35.175 27.183,35.175 27.3,35.292 27.3,35.4 27.45,35.55 D13.2@27.5,35.55 ; D13.2@27.55,35.55 27.7,35.4 27.7,35.292 27.817,35.175 58.68,35.175 62,38.495 62,44.5 70.75,53.25 81.745,53.25 88.2,46.795 88.2,43.528 ; C69.2@88.517,43.528 88.2,43.528 ; IC1_S1.47@89.759,41.355 89.759,41.285 89.185,40.711 89.185,40.675 89.068,40.558 88.902,40.558 88.2,41.261 88.2,43.528
RDTX_IN_S2_N: C75.2 IC1_S2.46 T2.4 | length 83.6
  Top Layer w0.2: T2.4@154.19,37.46 154.47,37.74 154.74,37.74 155.075,38.075 155.075,39.708 155.192,39.825 156,39.825 182.075,39.825 198.25,56 211,56 211.75,55.25 211.75,46.625 211.75,41.216 212.757,40.208 213.213,40.208 213.433,40.428 213.468,40.428 214.042,41.002 IC1_S2.46@214.113,41.002
RDTX_IN_S2_P: C76.2 IC1_S2.47 T2.6 | length 83.4
  Top Layer w0.2: T2.6@154.19,42.54 154.47,42.26 154.74,42.26 155.075,41.925 155.075,40.292 155.192,40.175 156,40.175 181.93,40.175 198.105,56.35 211.145,56.35 212.1,55.395 212.1,46.625 212.1,43.25 212.1,41.361 212.902,40.558 213.068,40.558 213.185,40.675 213.185,40.711 213.759,41.285 IC1_S2.47@213.759,41.355
RDTX_OUT_S1_N: C73.2 IC1_S1.45 T2.3 | length 66.7
  Top Layer w0.2: IC1_S1.45@90.466,40.648 90.466,40.719 90.99,41.243 90.99,41.521 90.799,41.712 90.799,41.795 91.5,42.495 91.5,44.162 92.588,45.25 ; C73.2@92.896,45.104 92.75,45.25 92.588,45.25 ; T2.3@145.81,37.46 145.555,37.46 144.925,38.09 144.925,39.708 144.808,39.825 144.12,39.825 143.432,39.825 112.425,39.825 107.588,44.662 102.997,49.253 96.59,49.253 92.588,45.25
RDTX_OUT_S1_P: C74.1 IC1_S1.48 T2.1 | length 67
  Top Layer w0.2: IC1_S1.48@89.406,41.709 89.476,41.709 90,42.233 90.278,42.233 90.469,42.042 90.552,42.042 91.15,42.64 91.15,44.307 92.422,45.578 96.446,49.603 103.142,49.603 107.938,44.807 112.57,40.175 143.288,40.175 144.048,40.175 144.808,40.175 144.925,40.292 144.925,41.91 145.555,42.54 T2.1@145.81,42.54 ; C74.1@92.189,45.811 92.421,45.578
RDTX_OUT_S2_N: C78.2 D16.2 IC1_S2.45 T3.6 | length 84.1
  Top Layer w0.2: IC1_S2.45@214.466,40.648 214.466,40.719 214.99,41.243 214.99,41.521 214.841,41.67 214.841,41.836 215.25,42.245 215.25,44.25 215.25,45.55 215.25,50.755 217.395,52.9 254.605,52.9 261,46.505 261,40.75 266.925,34.825 272.5,34.825 272.558,34.766 272.558,34.65 272.708,34.5 D16.2@272.758,34.5 272.808,34.5 272.958,34.65 272.958,34.766 273.017,34.825 273.6,34.825 274,34.425 274,33 274.54,32.46 T3.6@274.81,32.46
RDTX_OUT_S2_P: C79.2 D15.2 IC1_S2.48 T3.4 | length 84.4
  Top Layer w0.2: IC1_S2.48@213.406,41.709 213.476,41.709 214,42.233 214.278,42.233 214.428,42.084 214.593,42.084 214.9,42.39 214.9,44.25 214.9,45.9 214.9,50.9 217.25,53.25 254.75,53.25 261.35,46.65 261.35,40.895 267.07,35.175 272.5,35.175 272.558,35.234 272.558,35.35 272.708,35.5 D15.2@272.758,35.5 272.775,35.5 272.925,35.35 272.925,35.234 272.983,35.175 273.616,35.175 274,35.559 274,37 274.54,37.54 T3.4@274.81,37.54
S1_CELL1: C57_S1.2 P3.3 R45_S1.2 R46_S1.2 | length 107.7
  Top Layer w0.2: v1(35.536,59.75) 35.836,59.45 105.55,59.45 v1(112,53) ; R46_S1.2@103.615,44.554 104.5,45.439 v1(104.5,45.5)
  Top Layer w0.4: C57_S1.2@35.5,66.5 36.25,66.5 36.75,66 36.75,60.964 v1(35.536,59.75) ; C57_S1.2@35.5,66.55 P3.3@35.5,70.45
  Bottom Layer w0.2: v1(104.5,45.5) 104.5,46 111.5,53 v1(112,53)
  Bottom Layer w0.4: R45_S1.2@32.25,58.577 32.293,58.62 32.293,59.293 32.75,59.75 v1@35.5,59.75
S1_CELL2: C54_S1.2 P3.4 R43_S1.2 R57_RB_C21.1 R57_RB_C31.1 R59_RB_C21.1 R59_RB_C31.1 | length 246.7
  Top Layer w0.2: C54_S1.2@33,66.5 33.5,66.5 34.25,65.75 34.25,61.5 33.5,60.75 33.5,59.5 34.25,58.75 104.75,58.75 113.25,50.25 v1(113.75,50.25) ; R43_S1.2@105.865,42.304 106.75,43.189 v1(106.75,43.25)
  Top Layer w0.4: C54_S1.2@33,66.5 P3.4@33,70.4 v1(33,74.5)
  Bottom Layer w0.2: v1(106.75,43.25) v1(113.75,50.25)
  Bottom Layer w0.4: v1(33,74.5) 34.52,76.02 42.63,76.02 45.15,73.5 132.75,73.5 139.552,66.698 R57_RB_C21.1@139.552,60.25 R59_RB_C21.1@139.552,56.25 ; R59_RB_C31.1@133.552,47.25 R57_RB_C31.1@133.552,51.25 137.5,51.25 139.6,53.35 R59_RB_C21.1@139.6,56.25
S1_CELL3: C51_S1.2 P3.5 R40_S1.2 R41_S1.2 | length 135.9
  Top Layer w0.2: v1(30,59.75) 30,58.3 30.45,57.85 104.4,57.85 v1(117.25,45) ; R41_S1.2@107.335,29.415 108.25,28.5 110.75,28.5 112.75,30.5 112.75,36.083 114.667,38 v1(119.75,38)
  Top Layer w0.4: v1(30,59.75) 31.75,61.5 31.75,66.25 31.5,66.5 C51_S1.2@30.5,66.5 P3.5@30.5,70.4
  Bottom Layer w0.2: v1(117.25,45) 119.75,42.5 v1(119.75,38)
  Bottom Layer w0.4: R40_S1.2@30,58.577 v1(30,59.75)
S1_CELL4: C48_S1.2 P3.6 R33_S1.2 R35_S1.2 R36_S1.2 R38_S1.2 R57_RB_C41.1 R57_RB_C51.1 R57_RB_NA11.1 R57_RB_NA21.1 R59_RB_C41.1 R59_RB_C51.1 R59_RB_NA11.1 R59_RB_NA21.1 | length 344.7
  Top Layer w0.2: v1(27.75,59.75) 27.75,57.9 28.5,57.15 103.35,57.15 115.5,45 v1(115.75,45) ; R33_S1.2@100.585,22.665 R36_S1.2@102.835,24.915 R38_S1.2@105.085,27.165 106.75,25.5 110.75,25.5 113.75,28.5 113.75,36.094 114.656,37 v1(118.5,37)
  Top Layer w0.4: v1(27.75,59.75) 29.25,61.25 29.25,66.25 29,66.5 C48_S1.2@28,66.5 ; C48_S1.2@28,66.55 P3.6@28,70.45 ; P3.6@28,70.4 v1(28,74.5)
  Bottom Layer w0.2: v1(115.75,45) 118.5,42.25 v1(118.5,37)
  Bottom Layer w0.4: R35_S1.2@27.75,58.577 v1(27.75,59.75) ; v1(28,74.5) 30.42,76.92 43.33,76.92 45.75,74.5 133.25,74.5 141,66.75 141,51.83 139.552,50.382 R59_RB_C41.1@139.552,38 R57_RB_C41.1@139.552,34 ; R59_RB_C51.1@133.552,7 R57_RB_C51.1@133.552,11 137.5,11 139.6,13.1 R57_RB_NA21.1@139.6,16 ; R57_RB_NA21.1@139.552,16 R59_RB_NA21.1@139.552,20 139.5,20.052 139.5,23 137.5,25 R59_RB_NA11.1@133.552,25 R57_RB_NA11.1@133.552,29 137.5,29 139.6,31.1 R57_RB_C41.1@139.6,34
S1_CELL5: C39_S1.2 P3.7 R27_S1.2 R28_S1.2 | length 149.5
  Top Layer w0.2: v1(25.5,59.75) 25.5,57.5 26.55,56.45 102.8,56.45 115.25,44 v1(115.25,41.75) ; R28_S1.2@98.335,20.415 100.75,18 106,18 115,27 v1(115,36)
  Top Layer w0.4: v1(25.5,59.75) 26.75,61 26.75,66.25 26.5,66.5 C39_S1.2@25.5,66.5 ; C39_S1.2@25.5,66.55 P3.7@25.5,70.45
  Bottom Layer w0.2: v1(115,36) 115,37.885 115.25,38.135 v1(115.25,41.75)
  Bottom Layer w0.4: R27_S1.2@25.5,58.577 v1(25.5,59.75)
S1_CELL6: C36_S1.2 P3.8 R25_S1.2 R57_RB_C61.1 R57_RB_C71.1 R59_RB_C61.1 R59_RB_C71.1 | length 284.9
  Top Layer w0.2: C36_S1.2@23,66.5 23.75,66.5 24.25,66 24.25,56.75 25.25,55.75 102.344,55.75 114.25,43.844 v1(114.25,42.75) ; R25_S1.2@96.085,18.165 99.25,15 105,15 116.25,26.25 116.25,35.91 v1(116.292,35.952)
  Top Layer w0.4: C36_S1.2@23,66.55 P3.8@23,70.45 ; P3.8@23,70.4 v1(23,74.5)
  Bottom Layer w0.2: v1(114.25,42.75) 115.75,42.75 116.25,42.25 116.25,35.993 v1(116.292,35.952)
  Bottom Layer w0.4: v1(23,74.5) 20.85,76.65 3.45,76.65 1.05,74.25 1.05,62.177 2.627,60.6 7.627,60.6 10.5,57.727 10.5,52 14.15,48.35 21.627,48.35 24.75,45.227 24.75,42.454 26.35,40.854 26.35,27.9 34.25,20 R59_RB_C71.1@42.698,20 R57_RB_C71.1@42.698,16 38.798,16 36.698,13.9 R59_RB_C61.1@36.698,11 ; R57_RB_C61.1@36.746,7 R59_RB_C61.1@36.746,11